# Altium PCB Converter.PcbDoc
Units mil, origin at the board's own origin, x right, y up, seen from the top; angles counter-clockwise.
Board outline 3380 x 5675 mil, 4 copper layers (Top Layer, GND, Vin, Bottom Layer), stack 68.756 mil thick; 43 components, 29 nets, 125 pads, 7 vias.
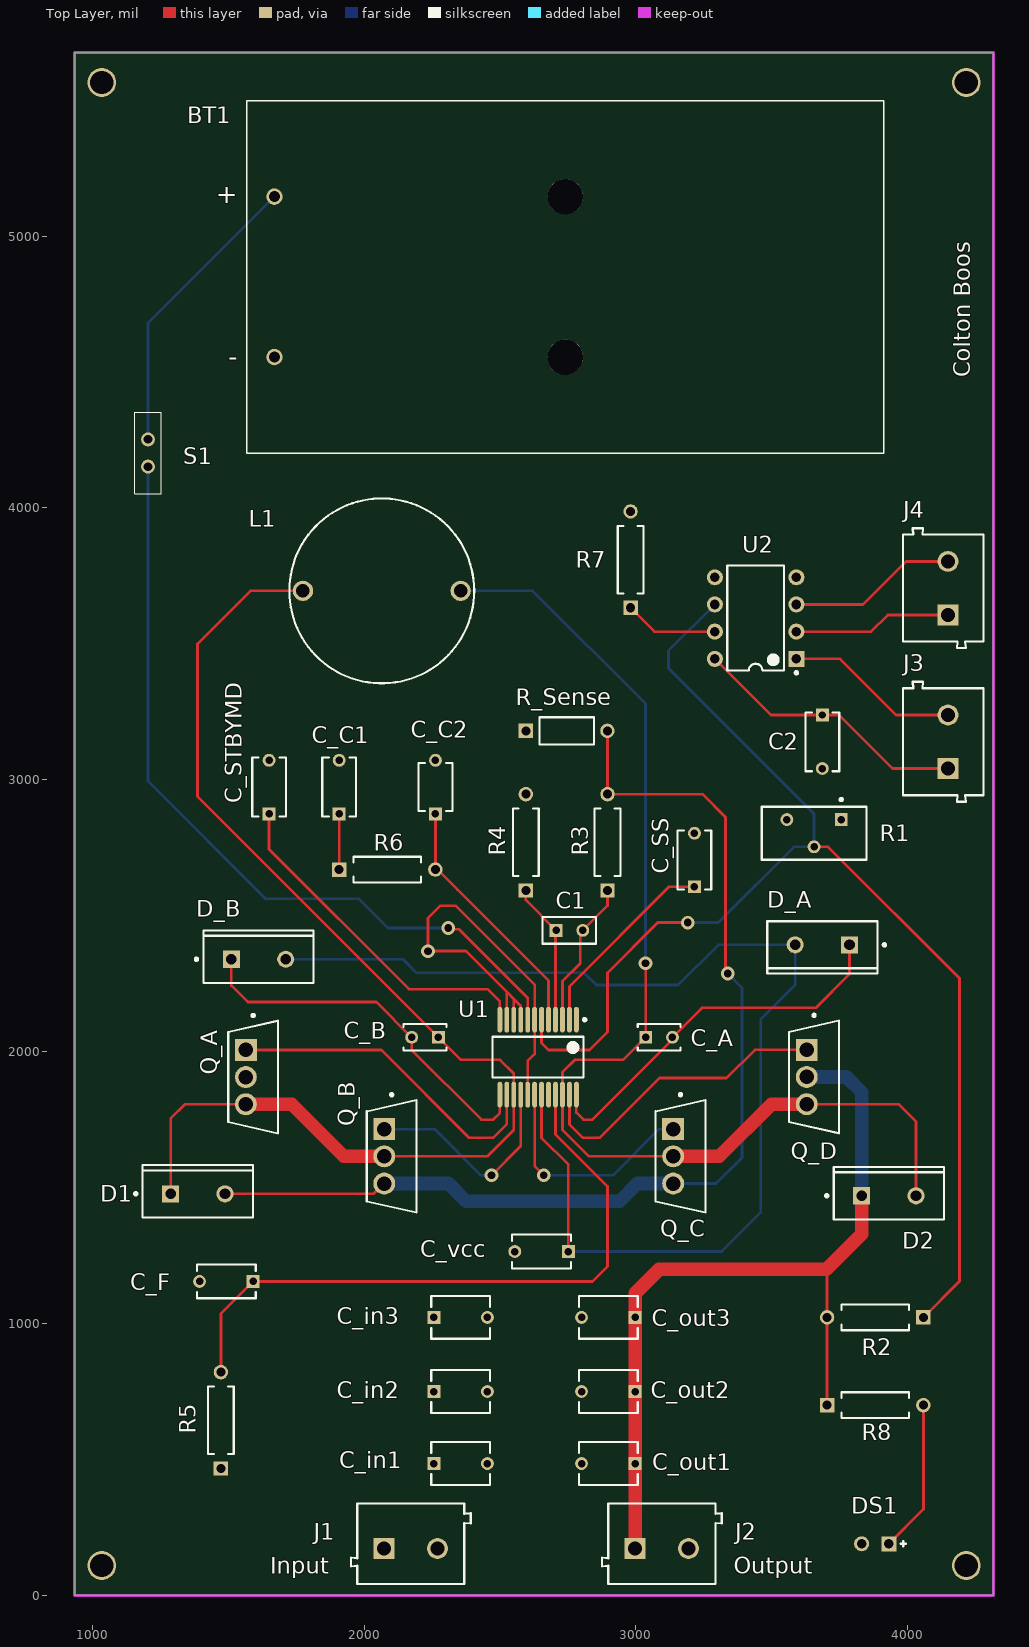
[diagram p0: Top Layer view]
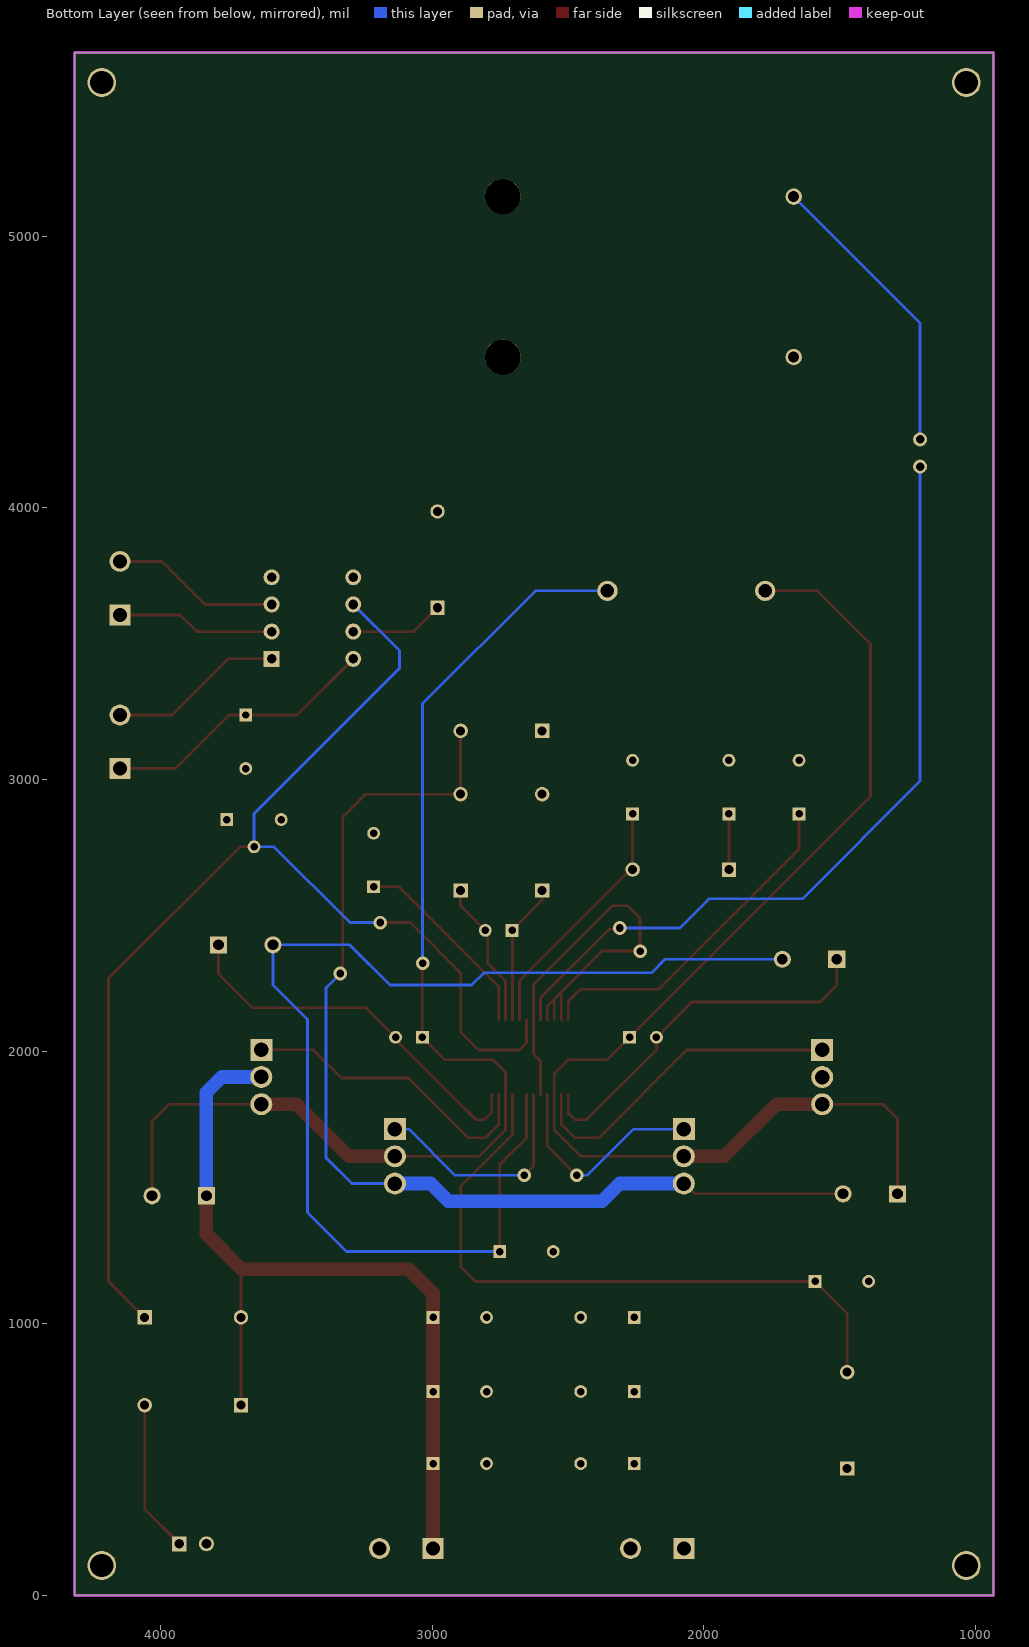
[diagram p1: Bottom Layer view, seen from below]
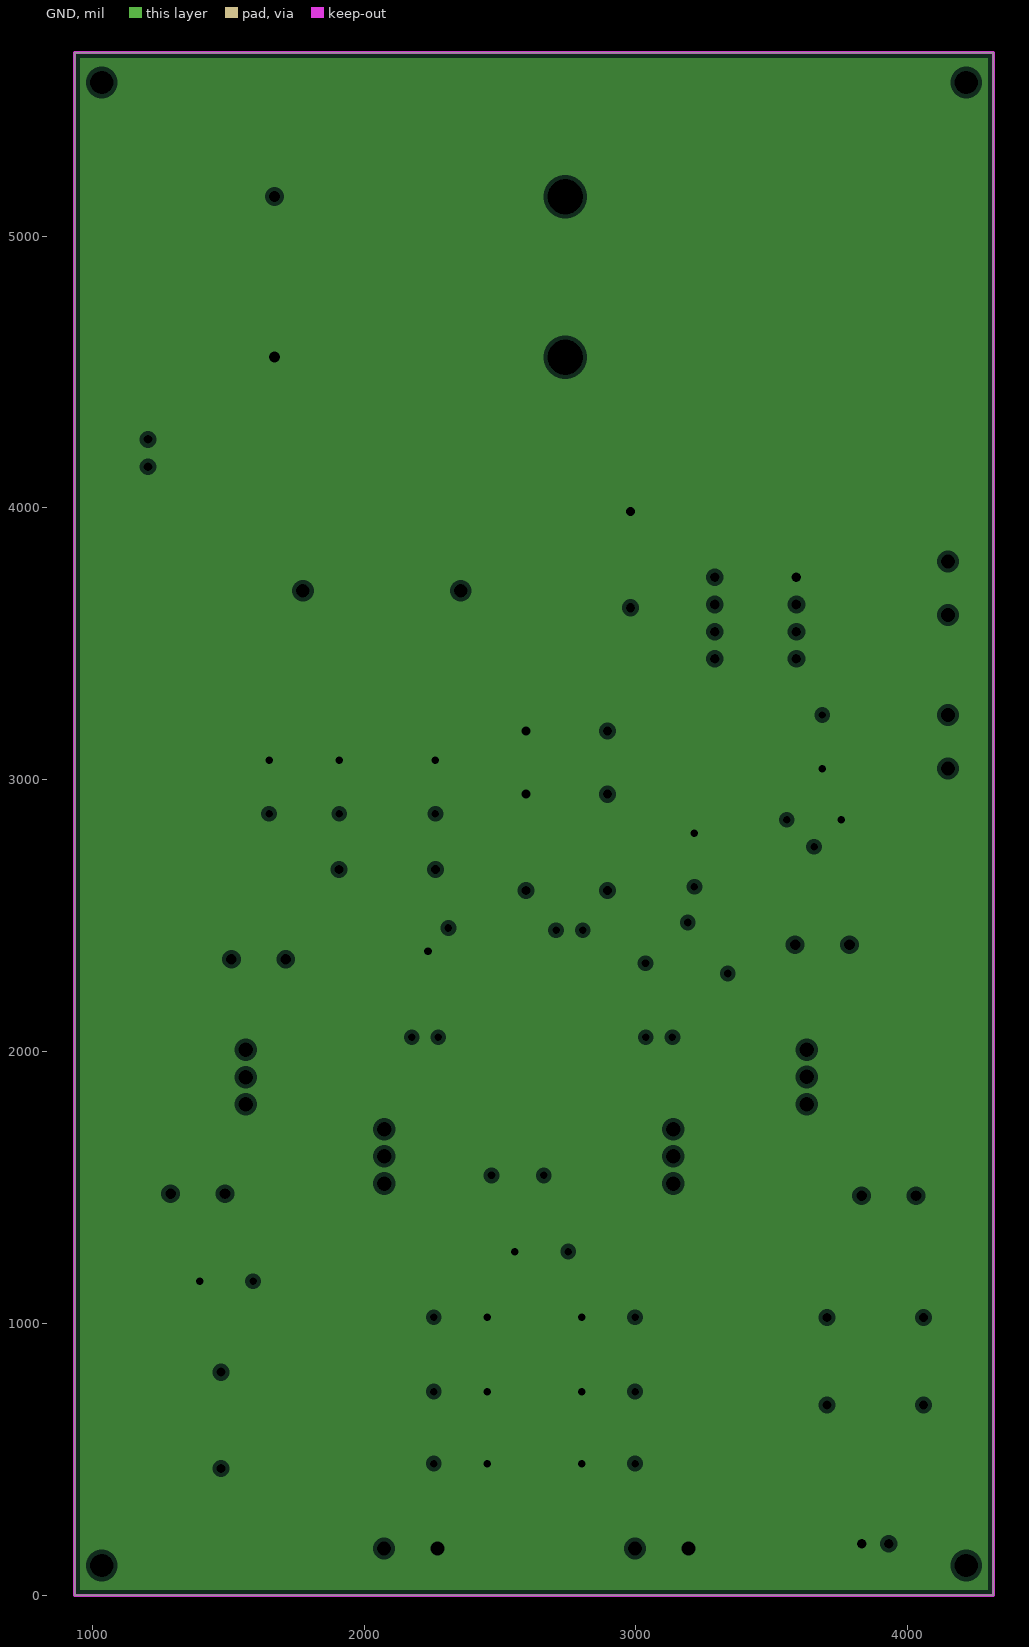
[diagram p2: GND, clearances drawn from the general rule]
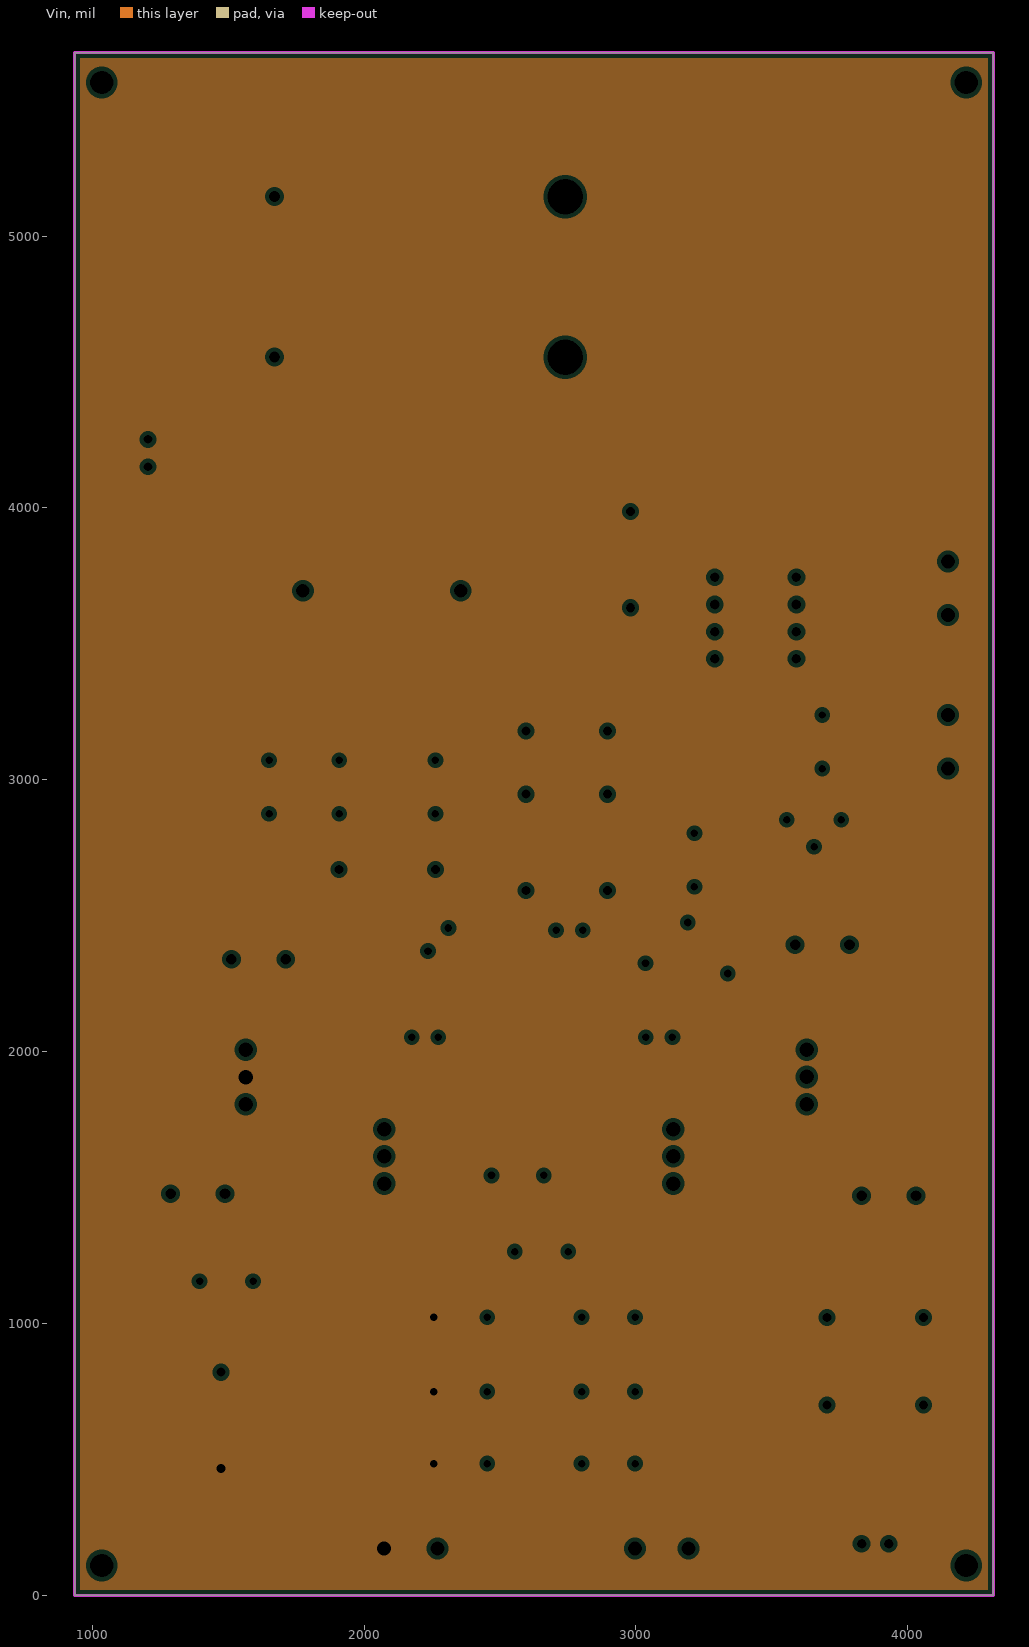
[diagram p3: Vin, clearances drawn from the general rule]
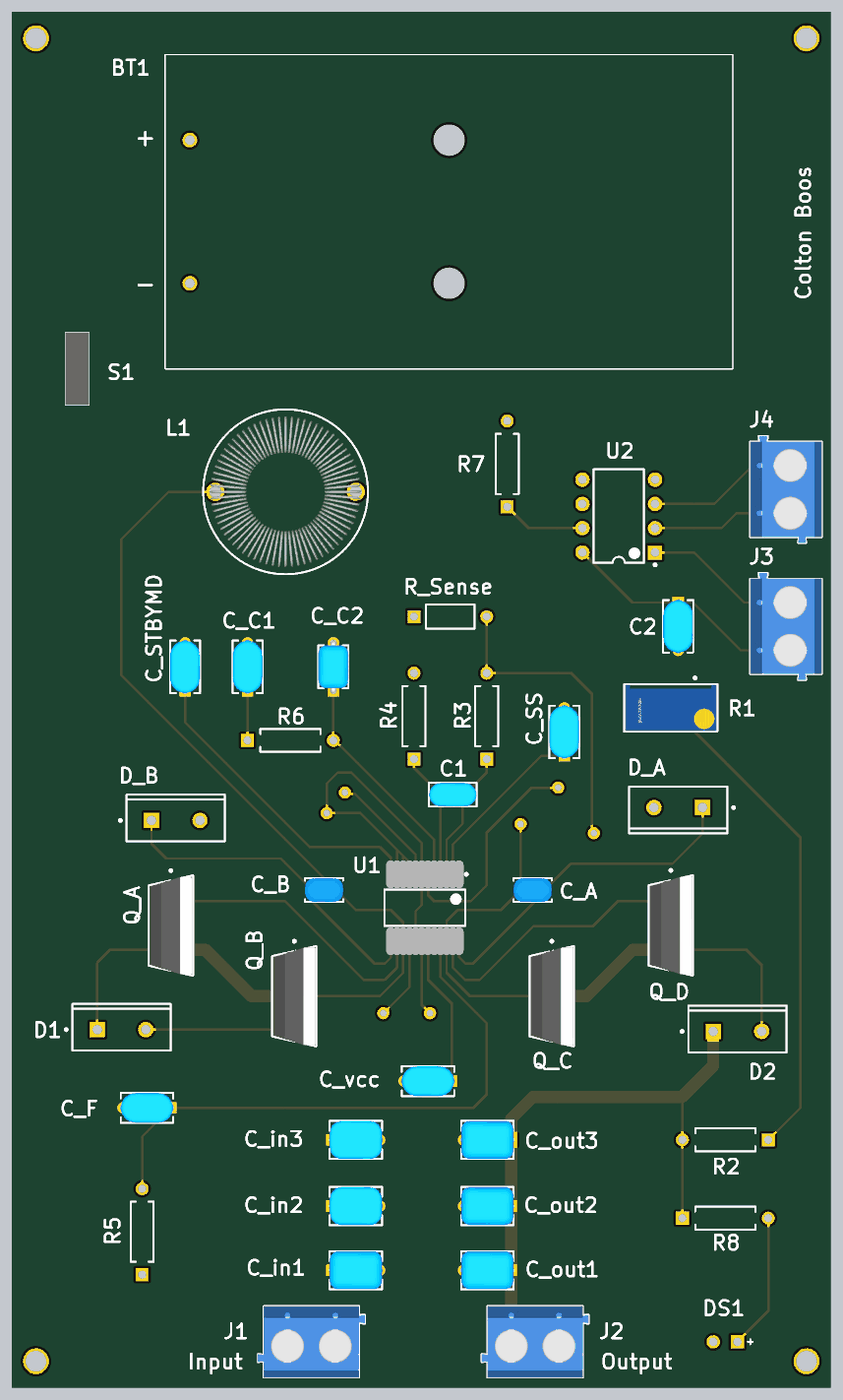
[diagram p4: 3D render of the assembled board from above, using the file's embedded part models]

## Layer stack, top to bottom
Top Solder: solder mask 0.5, Solder Resist, Dk 3.3
Top Layer: signal copper 0.7
Dielectric 1: prepreg 2.8, PP-006, Dk 4.1
GND: plane copper 1.378, net GND
Dielectric1: core 59, FR-4, Dk 4.3
Vin: plane copper 1.378, net VCC
Dielectric 2: prepreg 2.8, PP-006, Dk 4.1
Bottom Layer: signal copper 0.7
Bottom Solder: solder mask 0.5, Solder Resist, Dk 3.3

## Board outline
935,0 4315,0 4315,5675 935,5675

## Design rules (kind name [scope] priority, off if disabled: settings)
Clearance [All] p1: gap=7 ignorepadtopadclearanceinfootprint=FALSE
DiffPairsRouting [All] p1: maxlimit=10 minlimit=10 mostfreqgap=10 toplayer_minwidth=10 toplayer_maxwidth=10 toplayer_prefwidth=10 bottomlayer_minwidth=10 bottomlayer_maxwidth=10 bottomlayer_prefwidth=10 maxuncoupledlength=500
HoleSize [All] p1: absolutevalues=TRUE maxlimit=300 minlimit=10 maxpercent=80.000 minpercent=20.000
MinimumAnnularRing [All] p1: minimumring=9
PasteMaskExpansion [All] p1: expansion=10
PlaneClearance [All] p1: clearance=15
PlaneConnect [All] p1: pad.planeconnectstyle=Relief pad.reliefexpansion=20 pad.reliefentries=4 pad.reliefconductorwidth=10 pad.reliefairgap=10 via.planeconnectstyle=Direct via.reliefexpansion=20 via.reliefentries=4 via.reliefconductorwidth=10 via.reliefairgap=10
PolygonConnect [All] p1: thpad.connectstyle=Relief thpad.reliefconductorwidth=10 thpad.reliefentries=4 thpad.polygonreliefangle="90 Angle" thpad.airgapwidth=10 smdpad.connectstyle=Relief smdpad.reliefconductorwidth=10 smdpad.reliefentries=4 smdpad.polygonreliefangle="90 Angle" smdpad.airgapwidth=10 via.connectstyle=Direct via.reliefconductorwidth=10 via.reliefentries=4 via.polygonreliefangle="90 Angle" via.airgapwidth=10
RoomDefinition Converter [InComponentClass('Converter')] p1: confinementstyle=ConfineIn formatcopy=TRUE lockcomponents=FALSE outline 695,-220 4460,-220 4460,5825 695,5825
RoutingVias [All] p1: holewidth=10 width=20 viastyle="Through Hole" minholewidth=10 minwidth=20 maxholewidth=30 maxwidth=50
SMDNeckDown [All] p1: percent=100.000
SilkToSolderMaskClearance SilkscreenOverComponentPads [IsPad] p1: minsilkscreentomaskgap=8 clearancetoexposedcopper=TRUE
SolderMaskExpansion [All] p1: expansion=10 istentingtop=FALSE
Width [All] p1: maxlimit=51 minlimit=10 preferedwidth=10
24 further rules are at their usual default settings.

## Components (designator, comment, footprint, x,y, rotation, side; value= is the part's Value field where it differs from the comment)
BT1 "2462" BAT_2462 2740,4850 r180 top
C1 "RDE5C2A680J0P1H03B" FP-RDE0P1-MFG 2755.16,2446.26 r0 top
C2 "0.1uF" FP-RDE2M1-MFG 3685.47,3140 r270 top
C_A "0.47uF" FP-RCE1A2-MFG 3085,2052.95 r0 top
C_B "0.47uF" FP-RCE1A2-MFG 2224.09,2052.95 r180 top
C_C1 "RDER73A103K2K1H03B" FP-RDE2M1-MFG 1908.15,2973.25 r90 top
C_C2 "RDE5C2E470J1K1H03B" FP-RDE1K1-MFG 2262.48,2973.25 r90 top
C_F "RDE5C1H104J2K1H03B" FP-RDE2M1-MFG 1492.98,1155 r180 top
C_in1 "RDEC71H226MWK1H03B" FP-RDEWK1-MFG#1 2355,485 r0 top
C_in2 "RDER71H335K3K1H03B" FP-RDE3M1-MFG 2355,750 r0 top
C_in3 "RDER71H335K3K1H03B" FP-RDE3M1-MFG 2355,1022.68 r0 top
C_out1 "RDEC71E476MWK1H03B" FP-RDEWK1-MFG#1 2898.16,485 r180 top
C_out2 "RDEC71E476MWK1H03B" FP-RDEWK1-MFG#1 2898.15,750 r180 top
C_out3 "RDEC71E476MWK1H03B" FP-RDEWK1-MFG#2 2898.15,1022.68 r180 top
C_SS "RDE5C1H104J2K1H03B" FP-RDE2M1-MFG 3215,2705 r90 top
C_STBYMD "RDE5C1H104J2K1H03B" FP-RDE2M1-MFG 1650.32,2973.25 r90 top
C_vcc "4.7uF" FP-RDE2M1-MFG 2652.8,1265 r180 top
D1 "MBR745" ONSC-TO-220-2-221B-04_E 1388.23,1477.2 r90 top
D2 "MBR745" ONSC-TO-220-2-221B-04_E 3930.02,1470 r90 top
D_A "MBR745" ONSC-TO-220-2-221B-04_E 3685.47,2393.11 r270 top
D_B "MBR745" ONSC-TO-220-2-221B-04_E 1611.65,2340 r90 top
DS1 "LTL-1CHG" LTST-LTL-1CHG-2 3880,190 r180 top
J1 "691102710002" 691102710002 2171.58,190 r0 top
J2 "691102710002" 691102710002 3095,190 r0 top
J3 "691102710002" 691102710002 4130,3140 r90 top
J4 "691102710002" 691102710002 4130,3705 r90 top
L1 "2000-4R7-H-RC" 20004R7HRC 2355,3695 r180 top
Q_A "IRF530PBF" FP-X15-0364-MFG 1591.97,1906.54 r0 top
Q_B "IRF530PBF" FP-X15-0364-MFG 2101.1,1615 r0 top
Q_C "IRF530PBF" FP-X15-0364-MFG 3163.74,1615 r0 top
Q_D "IRF530PBF" FP-X15-0364-MFG 3655,1907 r0 top
R1 "3296Y-1-103LF" FP-3296Y-MFG 3655,2803.43 r90 top
R2 "MFR-25FBF52-1K" RESA60-630X240 3880,1022.68 r180 top value=100k
R3 "MFR-25FBF52-1K" RESA60-630X240 2895.32,2770 r90 top value=1k
R4 "MFR-25FBF52-1K" RESA60-630X240 2595,2770 r90 top value=1k
R5 "MFR-25FBF52-1K" RESA60-630X240 1473.3,644.02 r90 top value=10
R6 "MFR-25FBF52-1K" RESA60-630X240 2085,2670 r0 top value=100k
R7 "MFR-25FBF52-1K" RESA60-630X240 2980,3810 r90 top value=5k
R8 "MFR-25FBF52-1K" RESA60-630X240 3880,700 r0 top value=1k
R_Sense "WLAR020FE" OMTE-WLA-2_V2 2745,3180 r0 top
S1 "GB215AP" GB215AP 1205,4201.97 r180 top
U1 "LTC3780IG#PBF" LT-G-24_M 2640,1980 r270 top
U2 "MCP41010-I/P" PDIP300-P8 3440,3595 r180 top

## Footprints (in the part's own frame and the unit in brackets; to place one, negate y for a bottom-side part, rotate by r counter-clockwise, add the part's x,y. Pads: shape width x height; smd on the part's side, far side on the other; paste and mask are expansions set on the pad)
20004R7HRC [mm]
  round 1.9 hole 1.267: 1(0,0) 2(14.732,0)
  silkscreen extent -1.27,-8.63 16,8.63, body extent -0.53,-7.9 15.27,7.9, height 9.61
691102710002 [mm] "5,00mm - modular - blue - Horizontal entry with pressure clamp - 9,9 mm height - 02p"
  rect 1.95x1.95 hole 1.3: 1(-2.5,-0.45)
  round 1.95 hole 1.3: 2(2.5,-0.45)
  silkscreen extent -5.6,-3.75 5.6,3.75, body extent -5.6,-3.75 5.6,3.75, height 9.96
BAT_2462 [mm]
  round 1.53 hole 1.02: N(27.18,7.495) P(27.18,-7.495)
  round 3.3 hole 3.3 unplated: ""(0,7.495) ""(0,-7.495)
  silkscreen extent -29.74,-16.46 29.77,16.46
FP-3296Y-MFG [mm]
  rect 1.2x1.2 hole 0.7 paste-1000 mask+0: 1(1.275,-2.54)
  round 1.2 hole 0.7 paste-1000 mask+0: 2(-1.265,0) 3(1.275,2.54)
  silkscreen extent -2.48,-4.89 3.27,4.89, body extent -2.58,-4.99 2.58,4.99, height 0.25
FP-RCE1A2-MFG [mm]
  rect 1.2x1.2 hole 0.7 paste-1000 mask+0: 1(-1.25,0)
  round 1.2 hole 0.7 paste-1000 mask+0: 2(1.25,0)
  silkscreen extent -2,-1.25 2,1.25, body extent -2.1,-1.35 2.1,1.35, height 0.25
FP-RDE0P1-MFG [mm]
  rect 1.2x1.2 hole 0.7 paste-1000 mask+0: 1(-1.25,0)
  round 1.2 hole 0.7 paste-1000 mask+0: 2(1.25,0)
  silkscreen extent -2.5,-1.25 2.5,1.25, body extent -2.6,-1.35 2.6,1.35, height 0.25
FP-RDE1K1-MFG [mm]
  rect 1.2x1.2 hole 0.7 paste-1000 mask+0: 1(-2.5,0)
  round 1.2 hole 0.7 paste-1000 mask+0: 2(2.5,0)
  silkscreen extent -2.25,-1.58 2.25,1.58, body extent -3.2,-1.68 3.2,1.68, height 0.25
FP-RDE2M1-MFG [mm]
  rect 1.2x1.2 hole 0.7 paste-1000 mask+0: 1(-2.5,0)
  round 1.2 hole 0.7 paste-1000 mask+0: 2(2.5,0)
  silkscreen extent -2.75,-1.58 2.75,1.58, body extent -3.2,-1.68 3.2,1.68, height 0.25
FP-RDE3M1-MFG [mm]
  rect 1.2x1.2 hole 0.7 paste-1000 mask+0: 1(-2.5,0)
  round 1.2 hole 0.7 paste-1000 mask+0: 2(2.5,0)
  silkscreen extent -2.75,-2 2.75,2, body extent -3.2,-2.1 3.2,2.1, height 0.25
FP-RDEWK1-MFG#1 [mm]
  rect 1.2x1.2 hole 0.7 paste-1000 mask+0: 1(-2.5,0)
  round 1.2 hole 0.7 paste-1000 mask+0: 2(2.5,0)
  silkscreen extent -2.75,-2 2.75,2, body extent -3.2,-2.1 3.2,2.1, height 0.25
FP-RDEWK1-MFG#2 [mm]
  rect 1.2x1.2 hole 0.7 paste-1000 mask+0.254: 1(-2.5,0)
  round 1.2 hole 0.7 paste-1000 mask+0: 2(2.5,0)
  silkscreen extent -2.75,-2 2.75,2, body extent -3.2,-2.1 3.2,2.1, height 0.25
FP-X15-0364-MFG [mm]
  rect 2.05x2.05 hole 1.35 paste-1000 mask+0: 1(-0.685,2.54)
  round 2.05 hole 1.35 paste-1000 mask+0: 2(-0.685,0) 3(-0.685,-2.54)
  silkscreen extent -2.32,-5.26 2.32,5.88, body extent -2.42,-5.36 2.42,5.36, height 0.25
GB215AP [mm]
  round 1.3 hole 0.8: 1(0,1.27) 2(0,-1.27)
  silkscreen extent -1.25,-3.8 1.25,3.8, body extent -1.25,-3.8 1.25,3.8, height 10.1
LT-G-24_M [mm] "SOP, 24-Leads, Body 8.5x5.6mm, Pitch 0.65mm, IPC Low Density"
  oval 2.4x0.45 smd: 1(-3.5,3.575) 2(-3.5,2.925) 3(-3.5,2.275) 4(-3.5,1.625) 5(-3.5,0.975) 6(-3.5,0.325) 7(-3.5,-0.325) 8(-3.5,-0.975) 9(-3.5,-1.625) 10(-3.5,-2.275) 11(-3.5,-2.925) 12(-3.5,-3.575) 13(3.5,-3.575) 14(3.5,-2.925) 15(3.5,-2.275) 16(3.5,-1.625) 17(3.5,-0.975) 18(3.5,-0.325) 19(3.5,0.325) 20(3.5,0.975) 21(3.5,1.625) 22(3.5,2.275) 23(3.5,2.925) 24(3.5,3.575)
  silkscreen extent -3.62,-4.25 1.9,4.47, body extent -2.8,-4.25 2.8,4.25, height 2
LTST-LTL-1CHG-2 [mm] "TH, 2-Leads, Dia 3.8mm"
  rect 1.4x1.4 hole 0.9: 1(-1.27,0)
  round 1.4 hole 0.9: 2(1.27,0)
  silkscreen extent -2.87,-0.25 -2.37,0.25, body extent -1.9,-1.9 1.9,1.9, height 6.5
OMTE-WLA-2_V2 [mm] "2-Leads, Axial leaded, Body 2.54x5.08mm, Pin Spacing 7.62mm"
  rect 1.35x1.35 hole 0.85: 1(-3.81,0)
  round 1.35 hole 0.85: 2(3.81,0)
  silkscreen extent -2.54,-1.27 2.54,1.27, body extent -4.11,-1.26 4.11,1.27, height 2.54
ONSC-TO-220-2-221B-04_E [mm] "FM, 2-Leads, Body 10.3x4.85mm, Pitch 5.08mm"
  rect 1.6x1.6 hole 1: 1(0,2.54)
  round 1.6 hole 1: 3(0,-2.54)
  silkscreen extent -2.2,-5.15 2.7,5.92, body extent -2.18,-5.15 2.67,5.15, height 19.05
PDIP300-P8 [mm] "8-Pin Plastic Dual In-Line Package (PDIP)"
  rect 1.5x1.5 hole 0.9: 1(-3.81,3.81)
  round 1.5 hole 0.9: 2(-3.81,1.27) 3(-3.81,-1.27) 4(-3.81,-3.81) 5(3.81,-3.81) 6(3.81,-1.27) 7(3.81,1.27) 8(3.81,3.81)
  silkscreen extent -3.94,-4.9 2.65,5.23, body extent -3.55,-4.9 3.55,4.9, height 4.32
RESA60-630X240 [mm] "Axial Resistor, 2-Leads, Dia 2.4mm, Body Length 6.3mm"
  rect 1.35x1.35 hole 0.85: 1(-4.5,0)
  round 1.35 hole 0.85: 2(4.5,0)
  silkscreen extent -3.15,-1.2 3.15,1.2, body extent -4.77,-1.19 4.77,1.2, height 2.4

## Part data
BT1: "Battery Holder (Open) AA 2 Cell PC Pin", Package=None, Availability=Unavailable, MF="{'manufacturer': u'Keystone'}", MP=2462, Price=None
C1: library part CMP-06035-029057-1, "Ceramic Capacitor 68pF ±5% 100V C0G Radial", Capacitance=68pF, Case/Package=Radial, Dielectric=C0G, Max Operating Temperature=125°C, Min Operating Temperature=-55°C, Package Quantity=500, Resistor Type=Ceramic, Tolerance=5%, Voltage Rating=100V, Height=3.5mm, Height - Seated (Max)=0.236inch, Lead Diameter=0.5mm, Lead Pitch=0.098inch, Length=0.197inch, Mount="Through Hole", Packaging=Bulk, Termination=Radial, Voltage Rating (DC)=100V, Width=3.5mm
C2: library part CMP-06035-049833-1, "Ceramic Capacitor 4.7uF ±10% 50V X7S Radial", Capacitance=4.7uF, Case/Package=Radial, Dielectric=X7S, Max Operating Temperature=125°C, Min Operating Temperature=-55°C, Package Quantity=1500, Resistor Type=Ceramic, Tolerance=10%, Voltage Rating=50V, Height=4mm, Height - Seated (Max)=0.236inch, Lead Diameter=0.5mm, Lead Pitch=0.197inch, Lead/Base Style=Kinked, Length=0.217inch, Mount="Through Hole", Packaging="Tape and Reel", Termination=Radial, Voltage Rating (DC)=50V, Width=0.124inch
C_A C_B: library part CMP-06035-009921-1, "Cap Ceramic 470nF 50V X7R ±10% Radial 2.5mm +125°C Automotive Bulk", Capacitance=470nF, Case/Package=Radial, Dielectric=X7R, Max Operating Temperature=125°C, Min Operating Temperature=-55°C, Package Quantity=500, Ratings=AEC-Q200, Resistor Type=Ceramic, Tolerance=10%, Voltage Rating=50V, Height=3.5mm, Height - Seated (Max)=0.138inch, Lead Diameter=0.5mm, Lead Pitch=0.098inch, Lead/Base Style=Straight, Length=0.157inch, Mount="Through Hole", Packaging=Bulk, Termination=Radial, Voltage Rating (DC)=50V, Width=0.098inch
C_C1: library part CMP-06035-036813-1, "Ceramic Capacitor 10nF ±10% 1kV X7R Radial", Capacitance=10nF, Case/Package=Radial, Max Operating Temperature=125°C, Min Operating Temperature=-55°C, Tolerance=10%, Voltage Rating=1kV, Lead/Base Style="Formed Leads", Mount="Through Hole", Packaging=Bulk
C_C2: library part CMP-06035-055819-1, "Ceramic Capacitor 47pF ±5% 250V C0G Radial"
C_F C_SS C_STBYMD: library part CMP-06035-058915-1, "Ceramic Capacitor 100nF ±5% 50V C0G Radial"
C_in1: library part CMP-06035-003638-1, "CAP CER 22UF 50V X7S RADIAL", Capacitance=22uF, Case/Package=Radial, Max Operating Temperature=125°C, Min Operating Temperature=-55°C, Tolerance=20%, Voltage Rating=50V, Lead/Base Style="Formed Leads", Mount="Through Hole", Packaging=Bulk
C_in2 C_in3: library part CMP-06035-014114-1, "Ceramic Capacitor 3.3uF ±10% 50V X7R Radial", Capacitance=3.3uF, Case/Package=Radial, Dielectric=X7R, Max Operating Temperature=125°C, Min Operating Temperature=-55°C, Package Quantity=500, Resistor Type=Ceramic, Tolerance=10%, Voltage Rating=50V, Height=5mm, Height - Seated (Max)=0.295inch, Lead Diameter=0.5mm, Lead Free="Lead Free", Lead Pitch=0.197inch, Lead/Base Style=Kinked, Length=0.217inch, Mount="Through Hole", Packaging=Bulk, Termination=Radial, Voltage Rating (DC)=50V, Width=0.157inch
C_out1 C_out2 C_out3: library part CMP-06035-015598-1, "Ceramic Capacitor 47uF ±20% 25V X7S Radial", Capacitance=47uF, Case/Package=Radial, Dielectric=X7S, Max Operating Temperature=125°C, Min Operating Temperature=-55°C, Package Quantity=500, Resistor Type=Ceramic, Tolerance=20%, Voltage Rating=25V, Height=7.5mm, Height - Seated (Max)=0.394inch, Lead Diameter=0.5mm, Lead Free="Lead Free", Lead Pitch=0.197inch, Lead/Base Style="Formed Leads", Length=0.217inch, Mount="Through Hole", Packaging=Bulk, Termination=Radial, Voltage Rating (DC)=25V, Width=0.157inch
C_vcc: library part CMP-06035-049833-1, "Ceramic Capacitor 4.7uF ±10% 50V X7S Radial", Case/Package=Radial, Dielectric=X7S, Max Operating Temperature=125°C, Min Operating Temperature=-55°C, Package Quantity=1500, Resistor Type=Ceramic, Tolerance=10%, Voltage Rating=50V, Capacitance=4.7uF, Height=4mm, Height - Seated (Max)=0.236inch, Lead Diameter=0.5mm, Lead Pitch=0.197inch, Lead/Base Style=Kinked, Length=0.217inch, Mount="Through Hole", Packaging="Tape and Reel", Termination=Radial, Voltage Rating (DC)=50V, Width=0.124inch
D1 D2 D_A D_B: library part CMP-1055-00594-1, "SWITCHMODE(TM) Power Rectifier, 2-Pin TO-220, Tube", Manufacturer="On Semiconductor", ComponentLink1Description="Manufacturer URL", ComponentLink1URL=http://www.onsemi.com/, ComponentLink2Description=Datasheet, ComponentLink2URL=http://www.onsemi.cn/pub_link/Collateral/MBR735-D.PDF, ComponentLink3Description="Package Specification", ComponentLink3URL=http://www.onsemi.com/pub_link/Collateral/BYW29-D.PDF, Configuration=Single, DatasheetVersion="Rev. 8", IFSM Max (A)=150, Mounting Technology="Through Hole", PackageDescription="2-Pin Flange Mount, Vertical Straight Lead, Body 9.97 x 4.44 mm, Pitch 5.08 mm", PackageReference=TO-220-2-221B-04_E, PackageVersion="Rev. E", Packing=Tube, PartNumber=MBR745, RoHS=FALSE
DS1: library part CMP-007-00019-2, "LED Uni-Color Green, 100 mW, 30 mA, -55 to 100 degC, 2-Pin THD, RoHS, Bulk", Case/Package=Radial, Colour=Green, Forward Current=30mA, Forward Voltage=2.6V, Manufacturer=Lite-On, Max Operating Temperature=100°C, Min Operating Temperature=-55°C, Package Description="2-Pin Through Hole Device, Dia 3.8 mm", Package Quantity=1000, Power=100mW, Datasheet URL=http://datasheet.octopart.com/LTL-1CHG-Lite-On-datasheet-143841.pdf, Datasheet Version=Mar-00, Illumination Colour=Green, Lens Style=Dome, Luminous Intensity=12.6mcd, Manufacturer URL=http://www.us.liteon.com/, Mounting Technology=TH, Nominal Vf=2.1V, Package Reference=LTL-1CHG, Packaging=Bulk, Pins=2, RoHS Compliant=True, Viewing Angle=60degrees
J1 J2 J3 J4: library part CMP-1502-03258-1, "Series 102 - 5.00 mm Horizontal Entry Modular with Pressure Clamp WR-TBL, 2 pin", Manufacturer="Wurth Elektronik", Operating Temperature=-40to105degC, Datasheet URL=http://katalog.we-online.de/em/datasheet/6911027100xx.pdf, Manufacturer URL=http://www.we-online.de, Mounting Technology=THT, Package Reference=691102710002, Packaging=Box, Part Number=691102710002, Pin Number=2, Pitch=5.00mm, Publisher=WurthElektronik
L1: "Inductor", Manufacturer_Name=Bourns, Datasheet Link=https://componentsearchengine.com/Datasheets/1/2000-4R7-H-RC.pdf, Height=10.414mm, Manufacturer_Part_Number=2000-4R7-H-RC
Q_A Q_B Q_C Q_D: library part CMP-02550-000190-1, "MOSFET N-CH 100V 14A TO-220AB", Continuous Drain Current=14A, Drain To Source Breakdown Voltage=100V, Drain To Source Resistance=0.16Ω, Gate To Source Voltage=20V, Input Capacitace At Vds="670pF @ 25V", Manufacturer=Vishay, Max Forward Diode Voltage=2.5V, Max Junction Temp=+175°C, Package=X15-0364, Power Dissipation=88W, Pulse Drain Current=56A, Temperature="-55°C to +175°C", Temperature Range Low=-55°C, Automotive=No, Category=Trans, ComponentLink2Description=Datasheet, ComponentLink2URL=http://www.vishay.com/docs/91019/91019.pdf, Depletion Mode=False, Device Class L1="Discrete Semiconductors", Device Class L2=Transistors, Device Class L3=MOSFETs, Digikey Description="MOSFET N-CH 100V 14A TO-220AB", Drain To Source Voltage=100V, Gate Charge At Vgs="26nC @ 10V", Height=19.89mm, Lead Free=Yes, Manufacturer Part Number=IRF530PBF, Mouser Description="MOSFET N-Chan 100V 14 Amp", Number Of Channels=1, Number Of N Channels=1, Octopart=https://octopart.com/irf530pbf-vishay-46547999, Reverse Recovery Charge=850nC, Reverse Recovery Time=150ns, RoHS=TRUE, Rthja Max=62°C/W, Standoff Height=3.33mm, Temperature Range High=+175°C, Threshold Vgs Max=4V, Threshold Vgs Min=2V, Turn Off Delay Time=23ns, Turn On Delay Time=10ns
R1: library part CMP-07234-000015-2, "TRIMMER 10K OHM 0.5W PC PIN TOP", Color=Blue, Insulation Resistance=1GR, Manufacturer Series=3296, Max Operating Temperature=125°C, Max Power Dissipation=500mW, Min Operating Temperature=-55°C, Package Quantity=50, Resistance=10kR, Resistance Law=Linear, Resistance Tolerance=10%, Resistor Type=Cermet, Temperature Coefficient=100ppm/°C, Actuator Orientation=Vertical, Actuator Type=SCREW, Depth=4.83mm, Height=0.395inch, Lead Free="Lead Free", Length=9.53mm, Military Standard=Not, Mount=Panel, Number of Pins=3, Number of Terminals/Pins=3, Number of Turns=25, Packaging=Rail/Tube, Power Rating=500mW, Radiation Hardening=No, REACH SVHC="No SVHC", RoHS Compliant=Yes, Series=3296, Taper=Linear, Technology=CERMET, Terminal Finish=Tin, Termination=Pin, Tolerance=10%, Type=Potentiometer, Weight=0.03oz, Width=9.53mm
R2 R3 R4 R5 R6 R7 R8: library part CMP-009-00048-4, "Axial Resistor, 1 KOhm, +/- 1%, 250 mW, -55 to 155 degC, 2-Pin THD, RoHS, Bulk", Case/Package=Axial, Manufacturer=Yageo, Max Operating Temperature=155°C, Min Operating Temperature=-55°C, Package Description="2-Pin Axial Lead, Dia 2.4 mm, Body Length 6.3 mm", Package Quantity=200, Package Reference=MFR-25, Power=250mW, Tolerance=1%, Voltage Rating=250V, Composition=CarbonFilm, Datasheet URL=http://www.yageo.com/documents/recent/Yageo%20LR_MFR_2013.pdf, Datasheet Version=Apr-13, Manufacturer URL=http://www.yageo.com/, Mounting Technology=TH, Packaging=Bulk, RoHS Compliant=True
R_Sense: library part CMP-1237-00001-1, "Miniature Wirewound Current Sense, 0.02 Ohm +/-1%, 0.5 W, 2-Pin THD, RoHS, 25pc Pack", Manufacturer=Ohmite, Power Rating="0.5 W", Rated Resistance="0.02 Ohm", Resistance Tolerance=+/-1%, ComponentLink1Description="Manufacturer URL", ComponentLink1URL=http://www.ohmite.com/, ComponentLink2Description=Datasheet, ComponentLink2URL=http://www.ohmite.com/cat/res_wl.pdf, ComponentLink3Description="Package Specification", ComponentLink3URL=http://www.ohmite.com/cat/res_wl.pdf, DatasheetVersion=May-14, Mounting Technology="Through Hole", PackageDescription="2-Pin Axial Lead, Body 5.08 x 2.54 mm, Lead Spread 25 mm", Packing="25pc Pack", PartNumber=WLAR020FE, RoHS=TRUE
S1: "Switch", Manufacturer_Name="NKK Switches", Datasheet Link=https://www.nkkswitches.com/pdf/GB2Pushbuttons.pdf, Height=10mm, Manufacturer_Part_Number=GB215AP
U1: library part CMP-0492-00697-1, "Buck-boost Controller, Constant Frequency, Current Mode Control with Power Good Output, 24-pin SOP (G-24), -40 to 125 degC, Pb-Free", Frequency Sync Range="200kHz - 400kHz", Manufacturer="Linear Technology", ComponentLink1Description="Manufacturer URL", ComponentLink1URL=http://www.linear.com/, ComponentLink2Description=Datasheet, ComponentLink2URL=http://cds.linear.com/docs/en/datasheet/3780ff.pdf, ComponentLink3Description="Package Specification", ComponentLink3URL=http://cds.linear.com/docs/en/packaging/SSOP_24_05-08-1640.pdf, DatasheetVersion="Rev. F", Mounting Technology="Surface Mount", Number of Outputs=1, PackageDescription="24-Pin Plastic SSOP, Body 8.2 x 5.3 mm, Pitch 0.65 mm", PackageReference=G-24, PackageVersion=Jun-10, PartNumber=LTC3780IG#PBF, RoHS=TRUE
U2: library part CMP-0188-00249-2, "Single/Dual Digital Potentiometer with SPI Interface, 8-Pin PDIP, Industrial Temperature", Code_JEDEC=MS-001, ComponentLink1Description="Manufacturer URL", ComponentLink1URL=http://www.microchip.com/, ComponentLink2Description=Datasheet, ComponentLink2URL=http://ww1.microchip.com/downloads/en/DeviceDoc/11195c.pdf, ComponentLink3Description="Package Specification", ComponentLink3URL=http://www.microchip.com/stellent/groups/techpub_sg/documents/packagingspec/en012702.pdf, DatasheetVersion=Jul-2003, PackageDescription="8-Lead Plastic Dual In-Line (P) - 300 mil Body [PDIP]", PackageReference=PDIP300-P8, PackageVersion="revBB, Aug-2009", RevisionNote="URLs added."

## Free pads (board coordinates)
  round 106 hole 86: ""(1035,110) ""(1035,5565) ""(4215,110) ""(4215,5565)

## Via types
v1: diameter 50, hole 28, Top Layer to Bottom Layer, 7 vias

## Nets (pads, with @x,y where several pads share a name; then routed paths per layer and width w, separated by ;. In a path a pad name is that pad's centre, name@x,y a point inside that pad or via, vN(x,y) a via of type N, cw(c..) or ccw(c..) an arc to the next point about the centre after c; other vN are vias at no path point)
BG1: Q_C.1 U1.18 | length 857.4
  Top Layer w10: U1.18 2627.2,1578.75 v1(2660.95,1545)
  Bottom Layer w10: v1(2660.95,1545) 2915,1545 3085,1715 Q_C.1
BG2: Q_B.1 U1.16 | length 806.5
  Top Layer w10: v1(2468.39,1545) 2576.02,1652.64 U1.16
  Bottom Layer w10: Q_B.1 2259.92,1715 2429.92,1545 v1(2468.39,1545)
GND: BT1.N C2.2 C_C1.2 C_C2.2 C_F.2 C_in1.2 C_in2.2 C_in3.2 C_out1.2 C_out2.2 C_out3.2 C_SS.2 C_STBYMD.2 C_vcc.2 DS1.2 J1.2 J2.2 R1.1 R4.2 R7.2 R_Sense.1 U1.7 U1.9 U1.10 U1.11 U1.17 U2.4 | length 1734.2
  Top Layer w10: U1.11 2524.84,2220 ; U1.10 2550.43,2194.41 ; C_vcc.2@2554.37,1268.94 2550.43,1265 C_vcc.2 C_vcc.2@2555,1265.63 ; U1.9@2576.02,2115.94 U1.9 2576.02,2168.82 2550.43,2194.41 ; U1.17 2601.61,1966.09 2627.2,1991.68 U1.7 2627.2,2246.4 2336.4,2537.2 2280.87,2537.2 2235,2491.34 v1(2235,2370) 2374.84,2370 2524.84,2220 ; 2524.84,2220 2550.43,2194.41
INTVcc: C_vcc.1 D_A.3 D_B.3 U1.19 | length 4402
  Top Layer w10: U1.19 2652.8,1683.27 2751.22,1584.84 C_vcc.1 C_vcc.1@2755.16,1268.94
  Bottom Layer w10: D_B.3 2143.27,2340 2193.27,2290 2809.28,2290 2854.28,2245 3154.68,2245 3302.8,2393.11 D_A.3 3585.47,2245.94 3458.54,2119.02 3458.54,1408.54 3315,1265 C_vcc.1
NetBT1_P: BT1.P S1.2 | length 1085.7
  Bottom Layer w10: S1.2 1205,4680.16 BT1.P
NetC1_1: C1.1 R4.1 U1.4 | length 521.7
  Top Layer w10: R4.1 2595,2557.2 C1.1 2703.81,2444.13 U1.4@2703.81,2117.96
NetC1_2: C1.2 R3.1 U1.3 | length 543
  Top Layer w10: U1.3 2729.57,2259.57 2795,2325 2795,2445.47 C1.2@2794.21,2446.26 ; C1.2 2806.54,2446.26 2807.32,2445.47 2807.32,2449.21 2895.32,2537.2 R3.1
NetC2_1: C2.1 J3.1 U2.8 | length 1024.8
  Top Layer w10: U2.8 3496.57,3238.43 C2.1 3746.57,3238.43 3943.42,3041.57 J3.1
NetC_A_2: C_A.2 D_A.1 U1.24 | length 1416
  Top Layer w10: U1.24 2780.75,1775.83 2806.57,1750 2839.37,1750 2919.06,1829.69 3134.21,2044.84 C_A.2 3242.59,2161.33 3661.33,2161.33 3785.47,2285.47 D_A.1
NetC_B_2: C_B.2 D_B.1 U1.13 | length 1393.8
  Top Layer w10: D_B.1 1511.65,2243.35 1572.13,2182.87 2044.96,2182.87 C_B.2 2174.88,2006.5 2431.38,1750 2475,1750 2499.25,1774.25 U1.13
NetC_C1_1: C_C1.1 R6.1 | length 204.8
  Top Layer w10: R6.1@1908.15,2670 C_C1.1
NetC_C2_1: C_C2.1 R6.2 U1.5 | length 933.8
  Top Layer w10: R6.2 R6.2@2262.48,2670 ; C_C2.1 R6.2@2262.48,2670 ; U1.5 2678.39,2261.3 2342.95,2596.73 2269.68,2670 R6.2@2262.48,2670
NetC_F_1: C_F.1 R5.2 U1.21 | length 2420.4
  Top Layer w10: R5.2 1473.3,1036.89 C_F.1 2840,1155 2895,1210 2895,1504.68 2703.98,1695.71 U1.21
NetC_SS_1: C_SS.1 U1.2 | length 734
  Top Layer w10: U1.2 2755.16,2240.16 3121.57,2606.57 C_SS.1
NetC_STBYMD_1: C_STBYMD.1 U1.12 | length 1278.2
  Top Layer w10: C_STBYMD.1 1650.32,2744.68 2165,2230 2454.41,2230 2499.25,2185.16 U1.12
NetD1_3: D1.3 Q_B.3 Q_C.3 R3.2 R_Sense.2 | length 3990.3
  Top Layer w10: D1.3 2033.65,1477.2 2071.44,1515 Q_B.3 ; R_Sense.2 2895.16,3179.84 2895.16,2947.32 2895,2947.17 R3.2 3244.08,2947.17 3328.91,2862.33 3328.91,2296.09 v1(3337.5,2287.5)
  Bottom Layer w10: Q_C.3 3295,1515 3390,1610 3390,2235 v1(3337.5,2287.5)
  Bottom Layer w50: Q_B.3 2310,1515 2375,1450 2940,1450 3005,1515 Q_C.3
NetDS1_1: DS1.1 R8.2 | length 562.7
  Top Layer w10: DS1.1 4057.17,317.17 R8.2
NetJ3_2: J3.2 U2.1 | length 643.3
  Top Layer w10: U2.1 3750.48,3445 3957.06,3238.43 J3.2
NetJ4_1: J4.1 U2.2 | length 583.2
  Top Layer w10: U2.2 3865,3545 3926.58,3606.57 J4.1
NetJ4_2: J4.2 U2.3 | length 623.3
  Top Layer w10: U2.3 3835,3645 3993.42,3803.42 J4.2
NetR1_2: R1.2 R2.1 U1.6 U2.6 | length 4756.1
  Top Layer w10: U1.6@2652.8,2117.56 2652.8,2032.13 2678.39,2006.54 2828.87,2006.54 2895,2072.67 2895,2290 3080,2475 v1(3190,2475) ; R1.2 3706.38,2753.62 4190,2270 4190,1155.51 R2.1
  Bottom Layer w10: v1(3190,2475) 3302.72,2475 3581.34,2753.62 R1.2 3655,2875.32 3120,3410.32 3120,3475 U2.6
NetR7_1: R7.1 U2.7 | length 346.4
  Top Layer w10: R7.1 3001.57,3611.26 3067.83,3545 U2.7
NetS1_1: S1.1 U1.8 | length 2963.8
  Top Layer w10: v1(2310,2454.96) 2314.96,2450 2350,2450 2601.61,2198.39 U1.8
  Bottom Layer w10: S1.1 1205,2995.53 1638.21,2562.32 1981.14,2562.32 2088.5,2454.96 v1(2310,2454.96)
SW1: C_A.1 D2.3 L1.1 Q_C.2 Q_D.3 U1.22 | length 4370.5
  Top Layer w10: v1(3035,2325) 3035.79,2324.21 C_A.1 2952.83,1970 2774.84,1970 2729.57,1924.72 U1.22 2729.57,1712.44 2827.01,1615 Q_C.2 ; Q_D.3 3965.64,1807 4030.02,1742.62 D2.3
  Top Layer w50: Q_C.2 3306.31,1615 3498.31,1807 Q_D.3
  Bottom Layer w10: L1.1 2620,3695 3035,3280 v1(3035,2325)
SW2: C_B.1 D1.1 L1.2 Q_A.3 Q_B.2 U1.15 | length 4502.8
  Top Layer w10: D1.1 1288.23,1753.9 1340.87,1806.54 Q_A.3 ; L1.2 1582,3695 1387,3500 1387,2939.26 C_B.1 2356.26,1970 2500,1970 2550.43,1919.57 U1.15 2550.43,1712.44 2452.99,1615 Q_B.2
  Top Layer w50: Q_A.3 1733.46,1806.54 1925,1615 Q_B.2
TG1: Q_D.1 U1.23 | length 1137.1
  Top Layer w10: U1.23 2755.16,1732.48 2804.37,1683.27 2866.44,1683.27 3086.52,1903.35 3333.35,1903.35 3437,2007 Q_D.1
TG2: Q_A.1 U1.14 | length 1223.3
  Top Layer w10: Q_A.1 2063.46,2006.54 2386.73,1683.27 2474.7,1683.27 2524.84,1733.41 U1.14
VCC: C_in1.1 C_in2.1 C_in3.1 J1.1 Q_A.2 R5.1
Vout: C_out1.1 C_out2.1 C_out3.1 D2.1 J2.1 Q_D.2 R2.2 R8.1 | length 3109.7
  Top Layer w10: 3699.7,1199.06 3702.83,1195.92 R2.2 R8.1
  Top Layer w50: J2.1 2996.58,1110.88 3084.75,1199.06 3699.7,1199.06 3830.02,1329.37 D2.1
  Bottom Layer w50: Q_D.2 3773.98,1907 3830,1850.98 D2.1
pads on no net: BT1. R1.3 U1.1 U1.20 U2.5

## Polygon pours and split planes (outlines as drawn)
GND on GND (split plane): 4294.9,20.1 955.1,20.1 955.1,5654.9 4294.9,5654.9
VCC on Vin (split plane): 4294.9,20.1 955.1,20.1 955.1,5654.9 4294.9,5654.9

## Keep-outs
Keep-Out Layer:
  the board outline again, w10

## Silkscreen, mask and mechanical layers (free items; w line width, h text height)
Top Overlay:
  text "Colton Boos" at 4230,4480 h60 r90
  text "Input" at 1655,79.99 h60
  text "Output" at 3360,79.99 h60
Board Outline:
  the board outline again, w10

## Text inside footprints (layer, text, board x,y; h text height)
BT1: Top Assembly "-" at 1535.67,4574.41 h70 r180; Top Assembly "+" at 1535.67,5178.74 h70 r180; Top Overlay "-" at 1535.67,4574.41 h70 r180; Top Overlay "+" at 1535.67,5178.74 h70 r180